# Altium PCB smuc.PcbDoc
Units mm, origin at the board's own origin, x right, y up, seen from the top; angles counter-clockwise.
Board outline 49.53 x 193.04 mm, 2 copper layers (Top, Bottom), stack 1.67 mm thick; 44 components, 97 nets, 390 pads, 0 vias.
Unrouted connection lines stored in the file: 242.
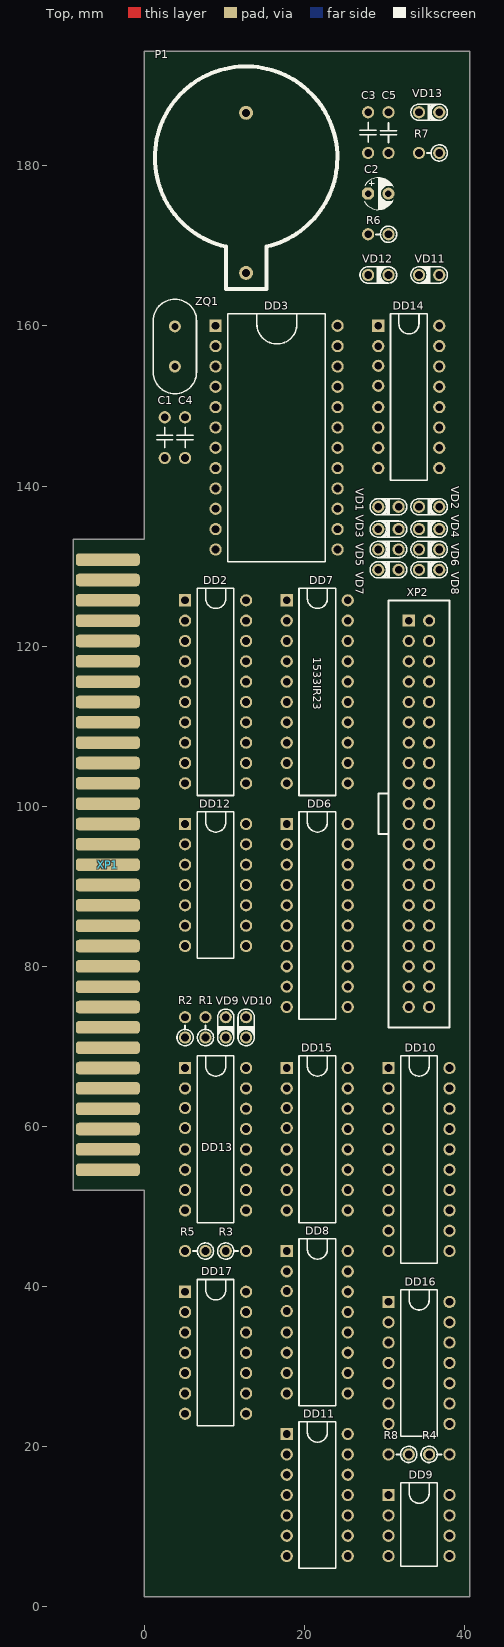
[diagram p0: Top view]
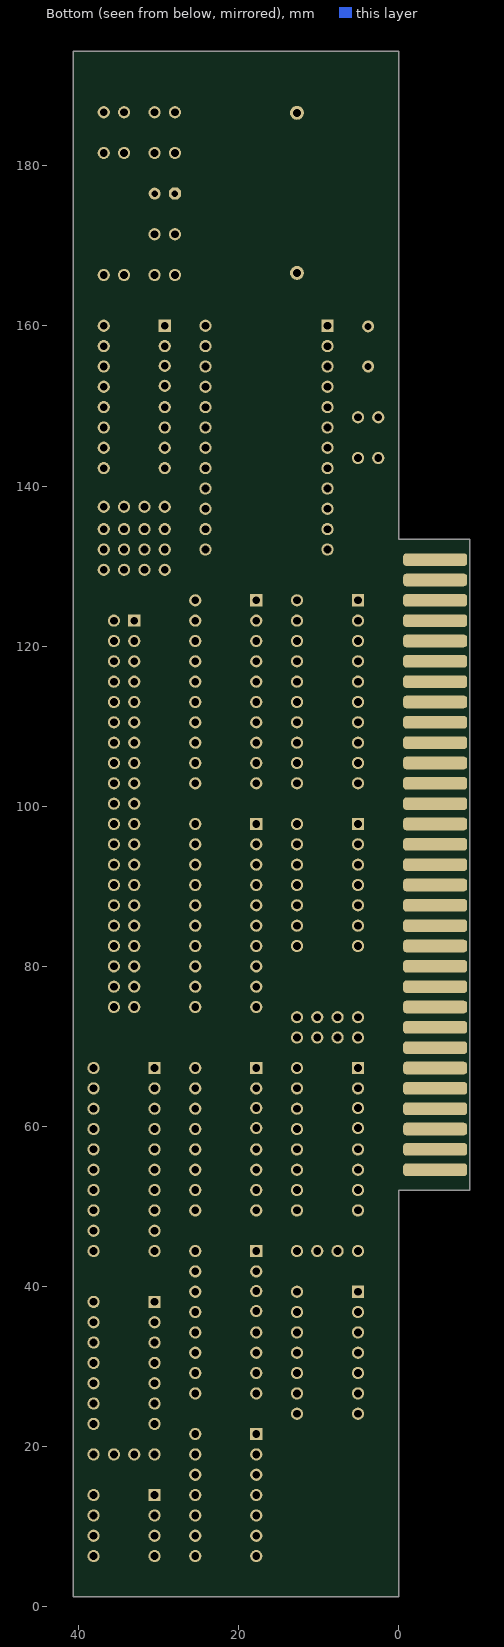
[diagram p1: Bottom view, seen from below]

## Layer stack, top to bottom
Top Solder: solder mask 0.01, Solder Resist, Dk 3.5
Top: signal copper 0.035
Dielectric 1: dielectric 1.6, FR-4, Dk 4.8
Bottom: signal copper 0.035
Bottom Solder: solder mask 0.01, Solder Resist, Dk 3.5

## Board outline
-8.89,52.07 0,52.07 0,1.27 40.64,1.27 40.64,194.31 0,194.31 0,133.35 -8.89,133.35 -8.89,120.142 -8.89,118.618

## Design rules (kind name [scope] priority, off if disabled: settings)
Clearance [All] p1: gap=0.2 except(0.5: Arc-Poly Track-Poly SMDPad-Poly THPad-Poly Via-Poly Fill-Poly Poly-Poly)
ComponentClearance DG126 [HasFootprint('DG126') vs HasFootprint('DG126')] p1: gap=-1 collisioncheckmode=3 verticalgap=0.2 showdistances=FALSE
ComponentClearance [All] p2: gap=0.3 collisioncheckmode=3 verticalgap=0.2 showdistances=FALSE
HoleSize [All] p1: absolutevalues=TRUE maxlimit=6.3 minlimit=0.2 maxpercent=80.000 minpercent=20.000
HoleToHoleClearance [All] p1: gap=0.4 allowstackedmicrovias=TRUE
MinimumSolderMaskSliver [All] p1: minsoldermaskwidth=0.1
PlaneConnect Via_Plane_Connect [(ObjectKind = 'Via')] p1: planeconnectstyle=Direct reliefexpansion=0.508 reliefentries=4 reliefconductorwidth=0.254 reliefairgap=0.254
PlaneConnect [All] p2: planeconnectstyle=Relief reliefexpansion=0.508 reliefentries=4 reliefconductorwidth=0.254 reliefairgap=0.254
PolygonConnect Via_Poly_Connect [(ObjectKind = 'Via')] p1: connectstyle=Direct reliefconductorwidth=0.254 reliefentries=4 polygonreliefangle="90 Angle" airgapwidth=0.254
PolygonConnect [All] p2: connectstyle=Relief reliefconductorwidth=0.254 reliefentries=4 polygonreliefangle="90 Angle" airgapwidth=0.254
RoutingVias [All] p1: holewidth=0.3 width=0.6 viastyle="Through Hole" minholewidth=0.3 minwidth=0.6 maxholewidth=0.3 maxwidth=0.6
SilkToSilkClearance [All] p1: silktosilkclearance=0.1
SilkToSolderMaskClearance [IsPad] p1: minsilkscreentomaskgap=0.1 clearancetoexposedcopper=TRUE
SolderMaskExpansion [All] p1: expansion=0.102
Width Width_2 [InNet('GND')] p1: maxlimit=0.6 minlimit=0.6 preferedwidth=0.6
Width [InNet('+5V')] p2: maxlimit=0.6 minlimit=0.6 preferedwidth=0.6
Width Width_3 [InNet('+12V')] p3: maxlimit=1 minlimit=1 preferedwidth=1
Width Width_1 [All] p4: maxlimit=0.2 minlimit=0.2 preferedwidth=0.2
23 further rules are at their usual default settings.

## Components (designator, comment, footprint, x,y, rotation, side; value= is the part's Value field where it differs from the comment)
C1 "K10-17_75" K10-17_75 2.54,148.59 r270 top
C2 "" El-d4-h7-F2.54 29.21,176.53 r180 top
C3 "K10-17_75" K10-17_75 27.94,186.69 r270 top
C4 "K10-17_75" K10-17_75 5.08,148.59 r270 top
C5 "K10-17_75" K10-17_75 30.48,181.61 r90 top
DD2 "1533AP6" DIP20 5.08,125.73 r0 top
DD3 "512VI1" DIP24_15 8.89,160.02 r0 top
DD6 "1533IR23" DIP20 17.78,97.79 r0 top
DD7 "1533IR23" DIP20 17.78,125.73 r0 top
DD8 "1533TM9" DIP16 17.78,44.45 r0 top
DD9 "24C16" DIP8 30.48,13.97 r0 top
DD10 "1533AP5" DIP20 30.48,67.31 r0 top
DD11 "1533LN1" DIP14 17.78,21.59 r0 top
DD12 "1533LA2" DIP14 5.08,97.79 r0 top
DD13 "1533ID7" DIP16 5.08,67.31 r0 top
DD14 "1533ID14" DIP16 29.21,160.02 r0 top
DD15 "1533IR15" DIP16 17.78,67.31 r0 top
DD16 "1533LL1" DIP14 30.48,38.1 r0 top
DD17 "1533LP8" DIP14 5.08,39.37 r0 top
P1 "BAT" BH810 12.7,166.624 r180 top
R1 "R0125-2_5" R0125-2_5 7.62,73.66 r270 top
R2 "R0125-2_5" R0125-2_5 5.08,73.66 r270 top
R3 "R0125-2_5" R0125-2_5 12.7,44.45 r180 top
R4 "R0125-2_5" R0125-2_5 38.1,19.05 r180 top
R5 "R0125-2_5" R0125-2_5 5.08,44.45 r0 top
R6 "R0125-2_5" R0125-2_5 27.94,171.45 r0 top
R7 "R0125-2_5" R0125-2_5 34.29,181.61 r0 top
R8 "R0125-2_5" R0125-2_5 30.48,19.05 r0 top
VD1 "KD522-2_5" KD522-2_5 31.75,137.414 r180 top
VD2 "KD522-2_5" KD522-2_5 34.29,137.414 r0 top
VD3 "KD522-2_5" KD522-2_5 31.75,134.62 r180 top
VD4 "KD522-2_5" KD522-2_5 34.29,134.62 r0 top
VD5 "KD522-2_5" KD522-2_5 31.75,132.08 r180 top
VD6 "KD522-2_5" KD522-2_5 34.29,132.08 r0 top
VD7 "KD522-2_5" KD522-2_5 31.75,129.54 r180 top
VD8 "KD522-2_5" KD522-2_5 34.29,129.54 r0 top
VD9 "KD522-2_5" KD522-2_5 10.16,73.66 r270 top
VD10 "KD522-2_5" KD522-2_5 12.7,73.66 r270 top
VD11 "KD522-2_5" KD522-2_5 36.83,166.37 r180 top
VD12 "KD522-2_5" KD522-2_5 27.94,166.37 r0 top
VD13 "LED" KD522-2_5 34.29,186.69 r0 top
XP1 "SCORP EDGE" SCORPION -4.572,130.81 r0 top
XP2 "IDE_CON" IDE_CON 33.02,123.19 r0 top
ZQ1 "RK169MD" RK169MD 3.81,154.94 r90 top

## Footprints (in the part's own frame and the unit in brackets; to place one, negate y for a bottom-side part, rotate by r counter-clockwise, add the part's x,y. Pads: shape width x height; smd on the part's side, far side on the other; paste and mask are expansions set on the pad)
BH810 [mm]
  round 1.75 hole 1: 1(0,0) 2(0,-20)
  silkscreen extent -11.4,-25.8 11.4,2, body extent -11.5,-25.61 11.5,2.39, height 8.5
DIP8 [mil]
  rect 60x60 hole 38: 1(0,0)
  round 60 hole 38: 2(0,-100) 3(0,-200) 4(0,-300) 5(300,-300) 6(300,-200) 7(300,-100) 8(300,0)
  silkscreen extent 60,-350 240,60
DIP14 [mil]
  rect 60x60 hole 38: 1(0,0)
  round 60 hole 38: 2(0,-100) 3(0,-200) 4(0,-300) 5(0,-400) 6(0,-500) 7(0,-600) 8(300,-600) 9(300,-500) 10(300,-400) 11(300,-300) 12(300,-200) 13(300,-100) 14(300,0)
  silkscreen extent 60,-660 240,60
DIP16 [mil]
  rect 60x60 hole 38: 1(0,0)
  round 60 hole 38: 2(0,-100) 3(0,-196.85) 4(0,-295.28) 5(0,-400) 6(0,-500) 7(0,-600) 8(0,-700) 9(300,-700) 10(300,-600) 11(300,-500) 12(300,-400) 13(300,-300) 14(300,-200) 15(300,-100) 16(300,0)
  silkscreen extent 60,-760 240,60
DIP20 [mil]
  rect 60x60 hole 38: 1(0,0)
  round 60 hole 38: 2(0,-100) 3(0,-200) 4(0,-300) 5(0,-400) 6(0,-500) 7(0,-600) 8(0,-700) 9(0,-800) 10(0,-900) 11(300,-900) 12(300,-800) 13(300,-700) 14(300,-600) 15(300,-500) 16(300,-400) 17(300,-300) 18(300,-200) 19(300,-100) 20(300,0)
  silkscreen extent 60,-960 240,60
DIP24_15 [mil]
  rect 60x60 hole 38: 1(0,0)
  round 60 hole 38: 2(0,-100) 3(0,-200) 4(0,-300) 5(0,-400) 6(0,-500) 7(0,-600) 8(0,-700) 9(0,-800) 10(0,-900) 11(0,-1000) 12(0,-1100) 13(600,-1100) 14(600,-1000) 15(600,-900) 16(600,-800) 17(600,-700) 18(600,-600) 19(600,-500) 20(600,-400) 21(600,-300) 22(600,-200) 23(600,-100) 24(600,0)
  silkscreen extent 60,-1160 540,60
El-d4-h7-F2.54 [mm]
  oct 1.5x1.5 hole 0.8: 1(1.27,0)
  round 1.5 hole 0.8: 2(-1.27,0)
  silkscreen extent -1.93,-2 1.75,2, body extent -2.03,-2.03 2.03,2.03, height 7.27
IDE_CON [mil]
  rect 60x60 hole 37.99: 1(0,0)
  round 60 hole 37.99: 2(100,0) 3(0,-100) 4(100,-100) 5(0,-200) 6(100,-200) 7(0,-300) 8(100,-300) 9(0,-400) 10(100,-400) 11(0,-500) 12(100,-500) 13(0,-600) 14(100,-600) 15(0,-700) 16(100,-700) 17(0,-800) 18(100,-800) 19(0,-900) 20(100,-900) 21(0,-1000) 22(100,-1000) 23(0,-1100) 24(100,-1100) 25(0,-1200) 26(100,-1200) 27(0,-1300) 28(100,-1300) 29(0,-1400) 30(100,-1400) 31(0,-1500) 32(100,-1500) 33(0,-1600) 34(100,-1600) 35(0,-1700) 36(100,-1700) 37(0,-1800) 38(100,-1800) 39(0,-1900) 40(100,-1900)
  silkscreen extent -150,-2000 200,100
K10-17_75 [mil]
  round 60 hole 38: 1(0,0) 2(200,0)
  silkscreen extent 50,-40 148,40
KD522-2_5 [mil]
  round 60 hole 38: 1(0,0) 2(100,0)
  silkscreen extent -40,-40 140,40
R0125-2_5 [mil]
  round 60 hole 38: 1(0,0) 2(100,0)
  silkscreen extent 40,-40 140,40
RK169MD [mm]
  round 1.5 hole 0.9: 1(0,0) 2(5,0)
  silkscreen extent -3.4,-2.7 8.4,2.7
SCORPION [mm]
  rrect50% 8x1.57 smd far side: 1(0,0) 2(0,-2.54) 3(0,-5.08) 4(0,-7.62) 5(0,-10.16) 6(0,-12.7) 7(0,-15.24) 8(0,-17.78) 9(0,-20.32) 10(0,-22.86) 11(0,-25.4) 12(0,-27.94) 13(0,-30.48) 14(0,-33.02) 15(0,-35.56) 16(0,-38.1) 17(0,-40.64) 18(0,-43.18) 19(0,-45.72) 20(0,-48.26) 21(0,-50.8) 22(0,-53.34) 23(0,-55.88) 24(0,-58.42) 25(0,-60.96) 26(0,-63.5) 27(0,-66.04) 28(0,-68.58) 29(0,-71.12) 30(0,-73.66) 31(0,-76.2)
  rrect50% 8x1.57 smd: 32(0,0) 33(0,-2.54) 34(0,-5.08) 35(0,-7.62) 36(0,-10.16) 37(0,-12.7) 38(0,-15.24) 39(0,-17.78) 40(0,-20.32) 41(0,-22.86) 42(0,-25.4) 43(0,-27.94) 44(0,-30.48) 45(0,-33.02) 46(0,-35.56) 47(0,-38.1) 48(0,-40.64) 49(0,-43.18) 50(0,-45.72) 51(0,-48.26) 52(0,-50.8) 53(0,-53.34) 54(0,-55.88) 55(0,-58.42) 56(0,-60.96) 57(0,-63.5) 58(0,-66.04) 59(0,-68.58) 60(0,-71.12) 61(0,-73.66) 62(0,-76.2)

## Part data
C2: library part K50-35_75PNT
P1: library part "Header 2"
VD13: library part KD522-2_5
XP1: library part "SCOR EDGE"

## Nets (pads, with @x,y where several pads share a name; then routed paths per layer and width w, separated by ;. In a path a pad name is that pad's centre, name@x,y a point inside that pad or via, vN(x,y) a via of type N, cw(c..) or ccw(c..) an arc to the next point about the centre after c; other vN are vias at no path point)
+5V: DD2.20 DD6.20 DD7.20 DD8.1 DD8.16 DD9.8 DD10.20 DD11.14 DD12.14 DD13.16 DD14.16 DD15.16 DD16.14 DD17.9 DD17.14 R7.2 R8.2 VD11.1 XP1.3 XP1.29 XP1.59
/DOS: DD16.2 XP1.4
A0: DD16.4 XP1.9
A1: DD12.11 XP1.10
A2: DD13.2 DD14.2 XP1.11
A5: DD12.6 XP1.23
A6: DD16.5 XP1.22
A7: DD12.5 XP1.21
A8: DD10.2 XP1.57
A9: DD10.4 XP1.27
A10: DD10.6 XP1.58
A11: DD12.3 XP1.28
A12: DD12.4 XP1.2
A13: DD13.3 DD14.3 XP1.33
A15: DD13.6 DD16.9 XP1.32
AB0: DD10.18 XP2.35
AB1: DD10.16 XP2.33
AB2: DD10.14
AS: DD3.14 DD11.10
CS0: R3.1 XP2.37
CS1: R5.2 XP2.38
CSM: DD2.19 DD10.1 DD12.8 DD13.4 DD16.10 DD17.1 DD17.4 DD17.10 DD17.13
D0: DD2.2 DD3.4 XP1.37
D1: DD2.3 DD3.5 XP1.38
D2: DD2.4 DD3.6 XP1.39
D3: DD2.5 DD3.7 XP1.42
D4: DD2.6 DD3.8 XP1.43
D5: DD2.7 DD3.9 XP1.41
D6: DD2.8 DD3.10 XP1.40
D7: DD2.9 DD3.11 XP1.34
DB0: DD2.18 DD6.2 DD7.3 DD8.3 XP2.17
DB1: DD2.17 DD6.5 DD7.4 XP2.15
DB2: DD2.16 DD6.6 DD7.7 XP2.13
DB3: DD2.15 DD6.9 DD7.8 DD8.6 DD10.9 DD15.3 DD15.14 VD7.1 VD8.1 XP2.11
DB4: DD2.14 DD6.12 DD7.13 DD8.11 XP2.9
DB5: DD2.13 DD6.15 DD7.14 DD8.13 DD10.7 DD15.4 DD15.13 VD5.1 VD6.1 XP2.7
DB6: DD2.12 DD6.16 DD7.17 DD8.14 DD10.5 DD15.5 DD15.12 VD3.1 VD4.1 XP2.5
DB7: DD2.11 DD6.19 DD7.18 DD8.4 DD10.3 DD15.6 DD15.11 VD1.1 VD2.1 XP2.3
DB8: DD6.3 DD7.2 XP2.4
DB9: DD6.4 DD7.5 XP2.6
DB10: DD6.7 DD7.6 XP2.8
DB11: DD6.8 DD7.9 XP2.10
DB12: DD6.13 DD7.12 XP2.12
DB13: DD6.14 DD7.15 XP2.14 XP2.22 XP2.24 XP2.26 XP2.28 XP2.30 XP2.40
DB14: DD6.17 DD7.16 XP2.16
DB15: DD6.18 DD7.19 XP2.18
DIOR: DD6.11 R2.1 XP2.25
DIOW: DD7.1 R1.1 XP2.23
DIR: DD2.1 DD16.11
DS: DD3.17 DD14.10
FD: DD14.6 DD15.2 DD15.9 DD15.10
GND: C1.2 C2.2 C3.1 C4.2 C5.2 DD2.10 DD3.12 DD3.13 DD6.10 DD7.10 DD8.8 DD9.4 DD10.10 DD11.7 DD12.7 DD13.5 DD13.8 DD14.8 DD15.8 DD15.15 DD16.7 DD17.7 P1.2 XP1.6 XP1.7 XP1.14 XP1.30 XP1.61 XP2.2 XP2.19 XP2.21
IORDY: DD17.12 XP2.27
IORGE: DD17.8 XP1.13
IORQ: DD16.1 XP1.48
IRQ1: DD10.17 XP2.31
M1: DD12.12 XP1.55
NetC1_1: C1.1 DD3.2 ZQ1.2
NetC2_2: C2.1 C3.2 DD3.24 R6.1 VD11.2 VD12.2
NetC4_1: C4.1 DD3.3 ZQ1.1
NetC5_1: C5.1 DD3.22 R6.2
NetDD8_10: DD8.10 R4.2
NetDD11_1: DD11.1 DD16.3
NetDD11_2: DD11.2 DD12.1
NetDD11_3: DD11.3 DD16.6
NetDD11_4: DD11.4 DD12.2
NetDD11_8: DD11.8 DD16.12
NetDD11_11: DD11.11 DD14.12
NetDD11_12: DD11.12 DD17.5
NetDD13_7: DD13.7 R2.2
NetDD13_9: DD13.9 R1.2
NetDD13_14: DD13.14 VD10.2
NetDD13_15: DD13.15 VD9.2
NetDD14_1: DD14.1 DD16.8
NetDD14_4: DD14.4 VD1.2 VD3.2 VD5.2 VD7.2
NetDD14_5: DD14.5 VD2.2 VD4.2 VD6.2 VD8.2
NetDD17_3: DD17.3 R3.2
NetDD17_6: DD17.6 R5.1
NetP1_1: P1.1 VD12.1
NetR7_1: R7.1 VD13.1
NetVD13_2: VD13.2 XP2.39
R/W: DD3.15 DD14.11
RD: DD15.1 DD16.13 XP1.49
RD_HI: DD6.1 DD13.12
RD_SYS: DD10.19 DD13.10
RES: DD3.18 XP1.20
RESET: DD8.2 XP2.1
RFSH: XP1.56
RTC: DD11.9 DD14.15 R8.1 VD9.1 VD10.1
SCL: DD8.15 DD9.6
SDA: DD9.5 DD10.15 R4.1
SW: DD8.5 DD11.13 DD14.14 DD17.2
WAIT: DD17.11 XP1.52
WP: DD8.12 DD9.7
WR: DD13.1 DD14.13 DD15.7
WR_HI: DD7.11 DD13.13
WR_SYS: DD8.9 DD13.11
pads on no net: DD3.1 DD3.16 DD3.19 DD3.20 DD3.21 DD3.23 DD8.7 DD9.1 DD9.2 DD9.3 DD10.8 DD10.11 DD10.12 DD10.13 DD11.5 DD11.6 DD12.9 DD12.10 DD12.13 DD14.7 DD14.9 XP1.1 XP1.5 XP1.8 XP1.12 XP1.15 XP1.16 XP1.17 XP1.18 XP1.19 XP1.24 XP1.25 XP1.26 XP1.31 XP1.35 XP1.36 XP1.44 XP1.45 XP1.46 XP1.47 XP1.50 XP1.51 XP1.53 XP1.54 XP1.60 XP1.62 XP2.20 XP2.29 XP2.32 XP2.34 XP2.36

## Dimensions
-8.89,133.35 to 0,194.31 on Mechanical 1
-8.89,52.07 to 0,1.27 on Mechanical 1
0,1.27 to 40.64,1.27 on Mechanical 1